# Altium PCB PCB1.PcbDoc
Units mm, origin at the board's own origin, x right, y up, seen from the top; angles counter-clockwise.
Board outline 46.86 x 26.86 mm, 2 copper layers (Top Layer, Bottom Layer), stack 1.57 mm thick; 17 components, 21 nets, 77 pads, 63 vias.
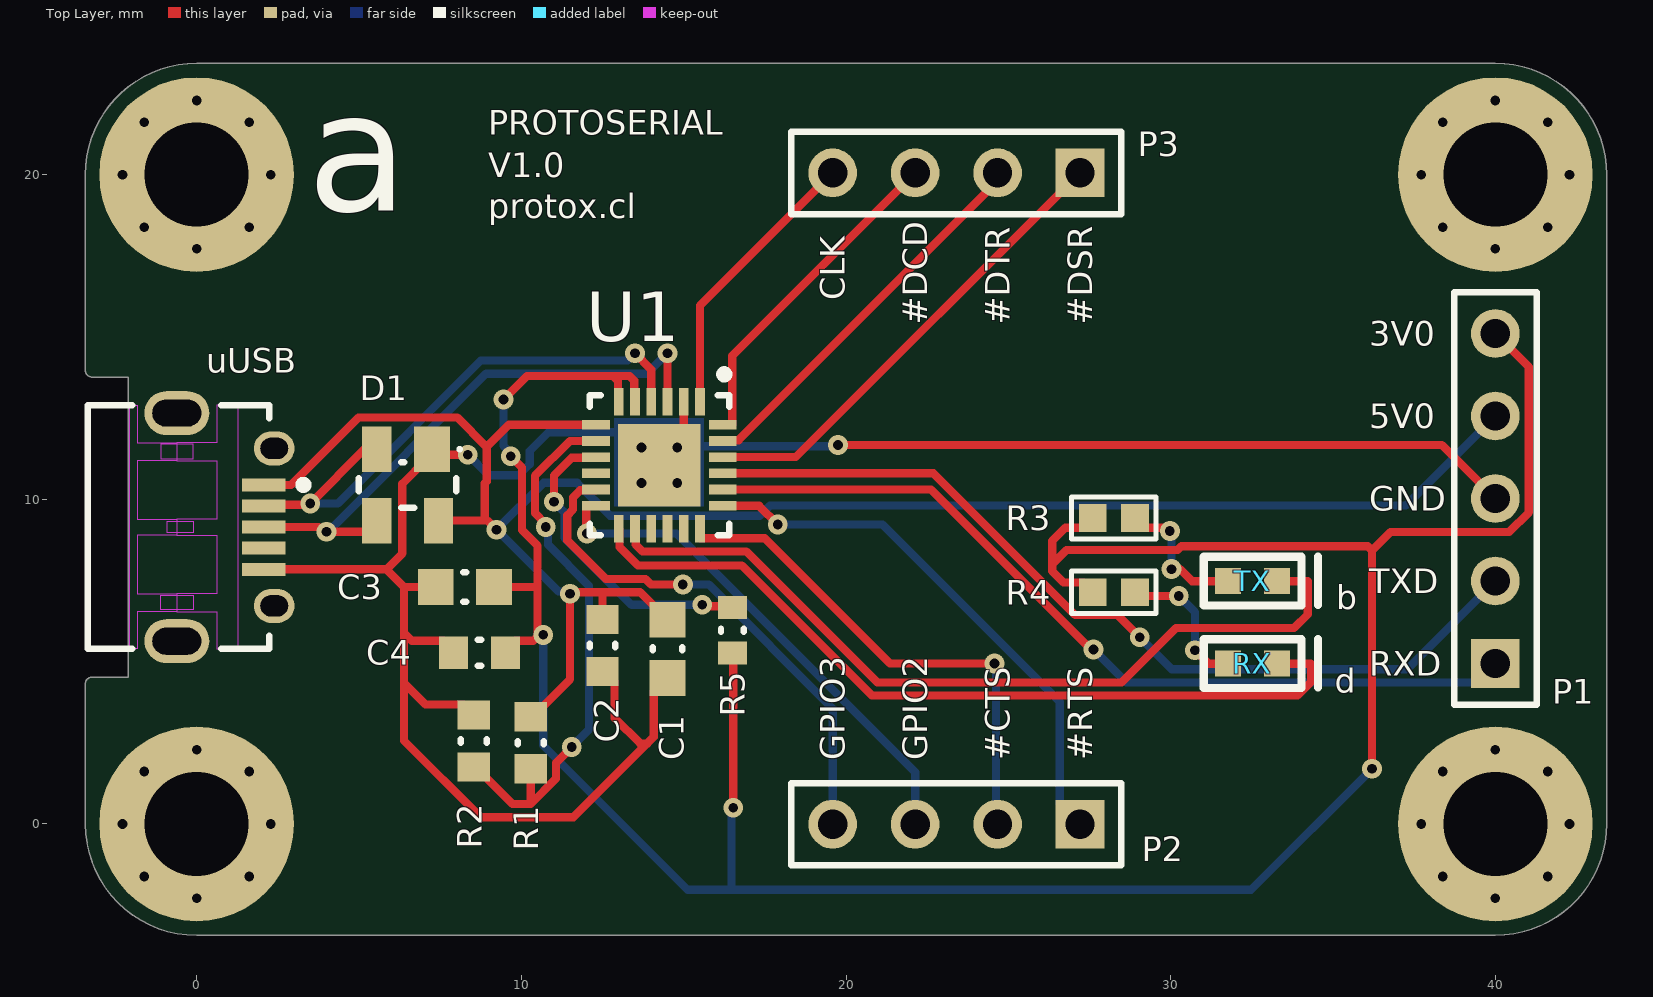
[diagram p0: Top Layer view]
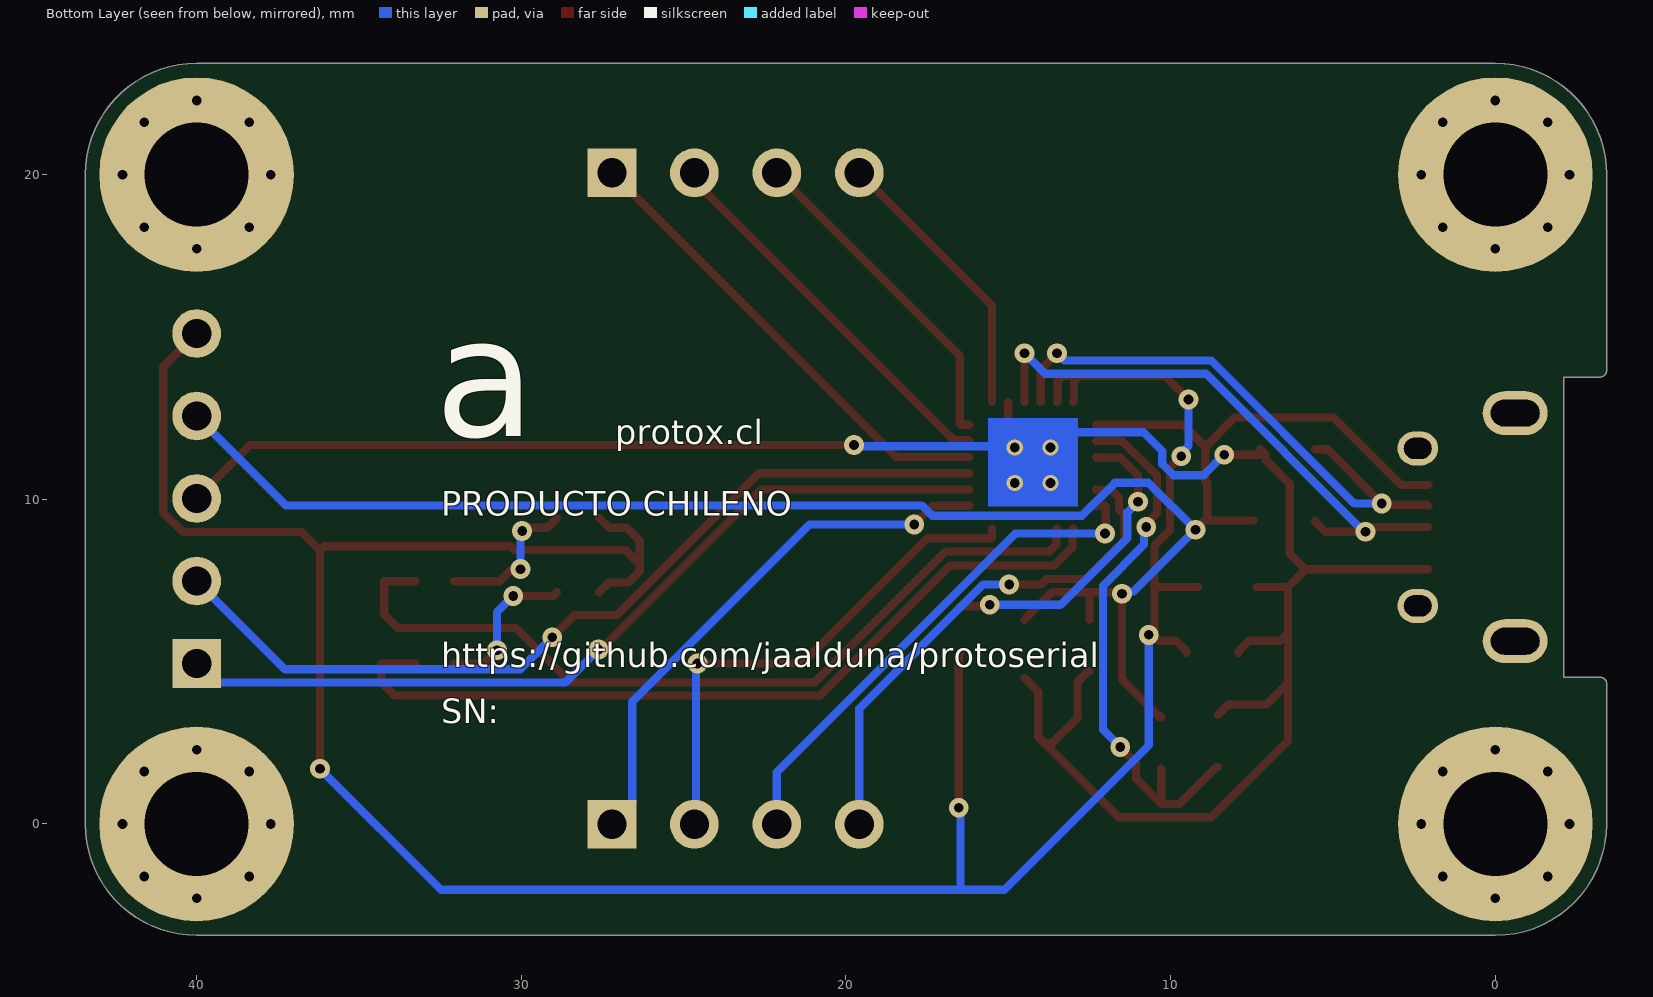
[diagram p1: Bottom Layer view, seen from below]

## Layer stack, top to bottom
Top Solder: solder mask 0.0102, Solder Resist, Dk 3.5
Top Layer: signal copper 0.035
Dielectric 1: dielectric 1.5, FR-4, Dk 4.8
Bottom Layer: signal copper 0.035
Bottom Solder: solder mask 0.0102, Solder Resist, Dk 3.5

## Board outline
-3.429,0 -3.429,4.318 cw(c-3.226,4.318) -3.226,4.521 -2.111,4.521 -2.111,13.767 -3.226,13.767 cw(c-3.226,13.97) -3.429,13.97 -3.429,20 cw(c0,20) 0,23.429 cw(c0,23.302) 0.001,23.429 39.926,23.429 cw(c39.926,23.302) 39.963,23.424 cw(c40,23.302) 40,23.429 cw(c40,20) 43.429,20 43.429,0 cw(c40,0) 40,-3.429 cw(c40,-3.302) 39.963,-3.424 cw(c39.926,-3.302) 39.926,-3.429 0,-3.429 cw(c0,-3.302) -0.001,-3.429 cw(c0,0)

## Design rules (kind name [scope] priority, off if disabled: settings)
Clearance [All] p1: gap=0.152 ignorepadtopadclearanceinfootprint=FALSE
MinimumSolderMaskSliver [All] p1: minsoldermaskwidth=0.152
PolygonConnect [All] p1: connectstyle=Relief reliefconductorwidth=0.254 reliefentries=4 polygonreliefangle="90 Angle" airgapwidth=0.254
RoomDefinition top [InComponentClass('top')] p1: confinementstyle=ConfineIn formatcopy=TRUE lockcomponents=FALSE outline -3.753,-1.656 41.647,-1.656 41.647,21.694 -3.753,21.694
RoutingVias [All] p1: holewidth=0.3 width=0.61 viastyle="Through Hole" minholewidth=0.3 minwidth=0.61 maxholewidth=0.3 maxwidth=0.61
SilkToSolderMaskClearance [IsPad] p1: minsilkscreentomaskgap=0.102 clearancetoexposedcopper=TRUE
SolderMaskExpansion [All] p1: expansion=0.102
Width [All] p1: maxlimit=0.254 minlimit=0.152 preferedwidth=0.254
28 further rules are at their usual default settings.

## Components (designator, comment, footprint, x,y, rotation, side; value= is the part's Value field where it differs from the comment)
C1 "CAP 4.7uF 10V 0603(1608)" CAPC0603(1608)100_M 14.5,5.394 r90 top value=4.7uF
C2 "CAP 100nF 10V 0603(1608)" CAPC0603(1608)100_N 12.5,5.5 r90 top value=100nF
C3 "CAP 4.7uF 10V 0603(1608)" CAPC0603(1608)100_M 8.26,7.301 r0 top value=4.7uF
C4 "CAP 100nF 10V 0603(1608)" CAPC0603(1608)100_N 8.71,5.271 r0 top value=100nF
D1 "SP0503BAHTG" LFUS-SOT143-4_V 6.5,10.444 r270 top
P1 "Header 5" HDR1X5 40,4.945 r90 top
P2 "Header 4" HDR1X4 27.21,-0.008 r180 top
P3 "Header 4" HDR1X4 27.21,20.058 r180 top
R1 "22K1 1% 0603(1608)" RESC0603(1608)_N 10.292,2.5 r90 top value="22100.00 Ohm"
R2 "47K5 1% 0603(1608)" RESC0603(1608)_N 8.54,2.556 r270 top value="47500.00 Ohm"
R3 "270" RES0603 28.25,9.426 r180 top
R4 "270" RES0603 28.25,7.14 r180 top
R5 "1K 5% 0603(1608)" RESC0603(1608)_L 16.5,5.969 r270 top value="1000.00 Ohm"
RX "LED_YELLOW" LED0603 33.268,4.938 r180 top
TX "LED_BLUE" LED0603 33.268,7.478 r180 top
U1 "CP2102N-A01-GQFN24" SLAB-QFN-24-2550x2550TP_A_V 14.25,11.05 r270 top
uUSB "ZX62D-B-5P8" HIRO-ZX62D-B-5P8_V 0.889,9.144 r270 top (schematic designator J1)

## Footprints (in the part's own frame and the unit in brackets; to place one, negate y for a bottom-side part, rotate by r counter-clockwise, add the part's x,y. Pads: shape width x height; smd on the part's side, far side on the other; paste and mask are expansions set on the pad)
CAPC0603(1608)100_M [mm] "Chip Capacitor, Body 1.6x0.8mm, Height 1.0mm, IPC Low Density"
  rect 1.1x1.1 smd: 1(-0.9,0) 2(0.9,0)
  silkscreen extent -0.05,-0.45 0.05,0.45, body extent -0.87,-0.47 0.88,0.48, height 1
CAPC0603(1608)100_N [mm] "Chip Capacitor, Body 1.6x0.8mm, Height 1.0mm, IPC Medium Density"
  rect 0.9x1 smd: 1(-0.8,0) 2(0.8,0)
  silkscreen extent -0.05,-0.4 0.05,0.4, body extent -0.87,-0.48 0.88,0.47, height 1
HDR1X4 [mm] "Connector; Header; 4 Position"
  rect 1.5x1.5 hole 0.9: 1(0,0)
  round 1.5 hole 0.9: 2(2.54,0) 3(5.08,0) 4(7.62,0)
  silkscreen extent -1.27,-1.27 8.89,1.27
HDR1X5 [mm] "Connector; Header; 5 Position"
  rect 1.5x1.5 hole 0.9: 1(0,0)
  round 1.5 hole 0.9: 2(2.54,0) 3(5.08,0) 4(7.62,0) 5(10.16,0)
  silkscreen extent -1.27,-1.27 11.43,1.27
HIRO-ZX62D-B-5P8_V [mm] "Micro-USB Connector, 9-Leads, Body 7.5x5.6mm, Pitch 0.65mm"
  rect 0.4x1.35 smd: 1(-1.3,1.175) 2(-0.65,1.175) 3(0,1.175) 4(0.65,1.175) 5(1.3,1.175)
  oval 1.05x1.25 hole 0.65 slot 0.85 at 90 deg: 6(-2.425,1.5) 7(2.425,1.5)
  oval 1.35x2 hole 0.825 slot 1.5 at 90 deg: 8(-3.513,-1.5) 9(3.513,-1.5)
  Top Layer keep-out region: 2.55,-2 2.1,-2 2.1,-1 2.55,-1
  Top Layer keep-out region: -2.55,-2 -2.1,-2 -2.1,-1 -2.55,-1
  Top Layer keep-out region: -0.18,-1.8 -0.18,-1 0.18,-1 0.18,-1.8
  Top Layer keep-out region: -3.75,-2.725 -2.6,-2.725 -2.6,-1.5 -2.05,-1.5 -2.05,-2.725 -0.25,-2.725 -0.25,-1.5 0.25,-1.5 0.25,-2.725 2.05,-2.725 2.05,-1.5 2.6,-1.5 2.6,-2.725 3.75,-2.725 3.75,-2.95 -3.75,-2.95
  Top Layer keep-out region: -2.6,-1.5 -2.05,-1.5 -2.05,-0.275 -0.25,-0.275 -0.25,-1.5 0.25,-1.5 0.25,-0.275 2.05,-0.275 2.05,-1.5 2.6,-1.5 2.6,-0.275 3.75,-0.275 3.75,0.395 -3.75,0.395 -3.75,-0.275 -2.6,-0.275
  silkscreen extent -3.75,-4.25 3.75,2.52, body extent -4.05,-4.15 4.05,1.65, height 2.75
LED0603 [mm]
  rect 0.8x0.8 smd: A(1.5,0) K(0,0)
  silkscreen extent -1.27,-0.76 2.25,0.75, body extent -0.08,-0.41 1.54,0.39, height 0.6
LFUS-SOT143-4_V [mm] "SOT143, 4-Leads, Body 3.04x1.4mm, Pitch 1.90mm"
  rect 1.4x1.1 smd: 1(-1.1,0.75)
  rect 1.4x0.9 smd: 2(-1.1,-0.95) 3(1.1,-0.95) 4(1.1,0.95)
  silkscreen extent -1.15,-1.5 0.7,1.65, body extent -0.7,-1.52 0.7,1.52, height 1.22
RES0603 [mm] "Chip Resistor, 2-Leads, Body 1.60x0.75mm (0603), IPC Medium Density"
  rect 0.85x0.85 smd: 1(-0.65,0) 2(0.65,0)
  silkscreen extent -1.3,-0.65 1.3,0.65, body extent -0.87,-0.43 0.87,0.43, height 0.35
RESC0603(1608)_L [mm] "Chip Resistor, Body 1.6x0.8mm, IPC High Density"
  rect 0.7x0.9 smd: 1(-0.7,0) 2(0.7,0)
  silkscreen extent -0.05,-0.35 0.05,0.35, body extent -0.85,-0.47 0.85,0.47, height 0.6
RESC0603(1608)_N [mm] "Chip Resistor, Body 1.6x0.8mm, IPC Medium Density"
  rect 0.9x1 smd: 1(-0.8,0) 2(0.8,0)
  silkscreen extent -0.05,-0.4 0.05,0.4, body extent -0.85,-0.47 0.85,0.47, height 0.6
SLAB-QFN-24-2550x2550TP_A_V [mm] "QFN, 6-Leads, Body 4x4mm, Pitch 0.5mm, Thermal Pad 2.55x2.55mm"
  rect 0.85x0.3 smd: 1(-1.95,1.25) 2(-1.95,0.75) 3(-1.95,0.25) 4(-1.95,-0.25) 5(-1.95,-0.75) 6(-1.95,-1.25) 13(1.95,-1.25) 14(1.95,-0.75) 15(1.95,-0.25) 16(1.95,0.25) 17(1.95,0.75) 18(1.95,1.25)
  rect 0.3x0.85 smd: 7(-1.25,-1.95) 8(-0.75,-1.95) 9(-0.25,-1.95) 10(0.25,-1.95) 11(0.75,-1.95) 12(1.25,-1.95) 19(1.25,1.95) 20(0.75,1.95) 21(0.25,1.95) 22(-0.25,1.95) 23(-0.75,1.95) 24(-1.25,1.95)
  rect 2.55x2.55 smd: 25(0,0)
  silkscreen extent -2.92,-2.15 2.15,2.15, body extent -2,-2 2,2, height 0.8

## Part data
C1 C3: library part CMP-1035-02787-1, "CAP 4.7uF 10V ±20% 0603 (1608 Metric) Thickness 1mm SMD", Case-EIA=0603, Case-Metric=1608, Rated Voltage="10 V", Tolerance=±20%, Max Thickness="1 mm", Technology=SMT
C2 C4: library part CMP-1035-02581-1, "CAP 100nF 10V ±20% 0603 (1608 Metric) Thickness 1mm SMD", Case-EIA=0603, Case-Metric=1608, Rated Voltage="10 V", Tolerance=±20%, Max Thickness="1 mm", Technology=SMT
D1: library part CMP-2000-05191-1, "TVS Diode Array, 30 pF, 30 KV, -40 to 85 degC, 4-Pin SOT143, RoHS, Tape and Reel", Capacitance Value=30pF, Clamping Voltage=8V, Leakage Current=0.1uA, Manufacturer=Littelfuse, Operating Temperature Classification=Industrial, Operating Temperature Max Deg. C=85C, Operating Temperature Min Deg. C=-40C, Operating Temp Range=-40Cto85C, Package / Case=SOT-143, Reverse Stand-off Voltage=5.5(Min)V, Working Voltage=5.5V, Working Voltage (Max)=5.5V(Min), Clamping Voltage (Max)=8V, Configuration=Triple, Datasheet URL=https://datasheet.ciiva.com/15143/getdatasheetpartid-116020-15143550.pdf, Datasheet Version=Dec-13, Direction Type=Uni-Directional, Leakage Current (Max)=0.1uA, Manufacturer URL=http://www.littelfuse.com/, Mounting=SurfaceMount, Mounting Style=SurfaceMount, Number of Elements=3, Package Type=SOT-143, Packaging=TapeandReel, Pin Count=3+Tab, Polarity=Uni-Directional, Product Depth (mm)=1.4mm, Product Height (mm)=1.05mm, Product Length (mm)=3.04mm, Rad Hardened=No, Suppressor Type=TVS
P1: "Header, 5-Pin", LatestRevisionDate=17-Jul-2002, LatestRevisionNote="Re-released for DXP Platform.", Publisher="Altium Limited"
P2 P3: "Header, 4-Pin", LatestRevisionDate=17-Jul-2002, LatestRevisionNote="Re-released for DXP Platform.", Publisher="Altium Limited"
R1: library part CMP-1012-00660-1, "22K1 0.1W 1% 0603 (1608 Metric)  SMD", Case-EIA=0603, Case-Metric=1608, Power="0.1 W", Tolerance="1 %", Technology=SMT
R2: library part CMP-1012-00700-1, "47K5 0.1W 1% 0603 (1608 Metric)  SMD", Case-EIA=0603, Case-Metric=1608, Power="0.1 W", Tolerance="1 %", Technology=SMT
R3 R4: library part 21, Package='0603', Tolerance=1%, ID=21, solutionId=87
R5: library part CMP-1012-00074-1, "1K 0.1W 5% 0603 (1608 Metric)  SMD", Case-EIA=0603, Case-Metric=1608, Power="0.1 W", Tolerance="5 %", Technology=SMT
RX: library part 7, "=description", Part Number="LED YELLOW", ID=7, solutionId=35, type=led
TX: library part 6, "=description", Part Number="LED BLUE", ID=6, solutionId=34, type=led
U1: library part CMP-2000-07570-1, "USBXpress(TM) Family, 4 GPIOs, 2.2 to 3.6 V, -40 to 85 degC, 24-Pin QFN, RoHS", Case\/Package=QFN, Manufacturer="Silicon Labs", Max Operating Temperature=85degC, Max Supply Voltage=3.6V, Min Operating Temperature=-40degC, Min Supply Voltage=3V, Package Description="24-Pin Quad Flat No-lead Package, Body 4 x 4 mm, Pitch 0.5 mm", Package Reference=QFN-24-2550x2550TP_A, Datasheet URL=http://www.silabs.com/documents/public/data-sheets/cp2102n-datasheet.pdf, Datasheet Version="Rev. 1.1, 08/2016", Manufacturer URL=http://www.silabs.com/, Mounting Technology=SurfaceMount, Number of Pins=24, REACH SVHC=Unknown, RoHSCompliant=False
uUSB: library part CMP-0029-00002-1, "Right Angle Receptacle Connector, Micro USB, 30 V(AC), -30 to 85 degC, 5-Pin SMD, RoHS, Tape and Reel", Capacitance="1 uF", Case/Package=1206, Case Code (Metric)=3216, Max Operating Temperature=125degC, Min Operating Temperature=-55degC, Package Quantity=2000, Resistance="7.5 Ohm", Tolerance=10%, Voltage Rating="35 V", Case Code (Imperial)=1206, ComponentLink1Description="Manufacturer URL", ComponentLink1URL=https://www.hirose.com, ComponentLink2Description=Datasheet, ComponentLink2URL=https://www.hirose.com/product/en/download_file/key_name/ZX62D-B-5P8/category/Catalog/doc_file_id/31704/?file_category_id=5&item_id=02420034000&is_series=, ComponentLink3Description="Package Specification", ComponentLink3URL=https://www.hirose.com/product/en/download_file/key_name/ZX62D-B-5P8/category/Drawing%20(2D)/doc_file_id/36535/?file_category_id=6&item_id=02420034000&is_series=, DatasheetVersion=Aug-16, ESR="7.5 Ohm", Height="1.8 mm", Length="3.2 mm", Mount="Surface Mount", PackageDescription="USB Connector, 5 Position Surface Mount, Length 8 mm, Height 2.65 mm", PackageReference=ZX62D-B-5P8, Packaging="Tape and Reel", Pins=2, Radiation Hardening=No, REACH SVHC="No SVHC", RoHSCompliant=True, Voltage Rating (DC)="35 V", Weight="0.000571 oz", Width="1.6 mm"

## Free pads (board coordinates)
  round 6 hole 3.2: 4(0,0) 4(0,20) 4(40,0) 4(40,20)

## Via types
v1: diameter 0.61, hole 0.3, Top Layer to Bottom Layer, 32 vias
v2: diameter 0.61, hole 0.3, Top Layer to Bottom Layer, tented both sides, 27 vias
v3: diameter 0.5, hole 0.3, Top Layer to Bottom Layer, 4 vias

## Nets (pads, with @x,y where several pads share a name; then routed paths per layer and width w, separated by ;. In a path a pad name is that pad's centre, name@x,y a point inside that pad or via, vN(x,y) a via of type N, cw(c..) or ccw(c..) an arc to the next point about the centre after c; other vN are vias at no path point)
3V3: C3.2 C4.2 P1.5 R3.2 R4.2 R5.2 U1.5 U1.6 | length 88.1
  Top Layer w0.254: C3.2 10.5,7.301 ; v2(9.45,13.075) 10.175,13.8 12.825,13.8 ; C4.2 9.51,5.321 9.833,5.644 10.369,5.644 10.5,5.775 10.625,5.775 v2(10.675,5.825) ; v2(9.675,11.326) 10.018,10.983 10.018,9.056 10.5,8.574 10.5,7.301 ; v2@10.5,5.825 10.5,7.301 ; U1.6@13,13 12.977,13.023 12.977,13.648 12.825,13.8 ; U1.5 13.477,13.023 13.477,13.659 13.336,13.8 12.825,13.8 ; R5.2 16.525,5.244 v2(16.525,0.5) ; R4.2 27.302,7.438 26.702,7.438 26.35,7.79 26.35,8 ; R3.2 27.302,9.128 26.76,9.128 26.35,8.718 26.35,8 ; v2(36.2,1.7) 36.2,8.425 ; P1.5 41.029,14.076 41.029,9.599 40.426,8.996 36.771,8.996 36.2,8.425 ; 26.35,8 26.791,8.441 30.217,8.441 30.333,8.556 36.069,8.556 36.2,8.425
  Bottom Layer w0.254: v2(9.45,13.075) 9.45,11.647 9.675,11.422 v2(9.675,11.326) ; v2(10.675,5.825) 10.675,2.424 15.124,-2.025 16.475,-2.025 ; v2(16.525,0.5) 16.475,0.45 16.475,-2.025 ; v2(36.2,1.7) 32.475,-2.025 16.475,-2.025
#CTS: P2.2 U1.18 | length 15.9
  Top Layer w0.254: U1.18 15.5,8.825 15.523,8.802 17.497,8.802 21.354,4.945 v2(24.575,4.945)
  Bottom Layer w0.254: v2(24.575,4.945) 24.623,4.898 24.623,0.04 P2.2
#DCD: P3.3 U1.24 | length 10.4
  Top Layer w0.254: U1.24 16.475,12.3 16.498,12.323 16.498,14.426 P3.3
#DSR: P3.1 U1.22 | length 14.6
  Top Layer w0.254: U1.22 18.452,11.3 P3.1
#DTR: P3.2 U1.23 | length 12
  Top Layer w0.254: U1.23 16.223,11.823 16.693,11.823 24.67,19.8 P3.2
#RI/CLK: P3.4 U1.1 | length 8.8
  Top Layer w0.254: U1.1 15.5,15.968 P3.4
#RTS: P2.1 U1.19 | length 16.9
  Top Layer w0.254: U1.19 17.325,9.8 v2(17.9,9.225)
  Bottom Layer w0.254: v2(17.9,9.225) 21.121,9.225 26.587,3.759 26.587,0.615 P2.1
GND: C1.1 C2.1 C3.1 C4.1 D1.1 P1.3 R2.1 U1.2 U1.25 uUSB.5 | length 69.6
  Top Layer w0.254: uUSB.5 5.844,7.844 ; D1.1 D1.1@7.082,11.376 ; C3.1 6.387,7.301 ; C4.1 7.91,5.321 7.587,5.644 6.627,5.644 6.387,5.885 ; v2(8.35,11.376) D1.1@7.082,11.376 ; R2.1 8.217,3.679 7.046,3.679 6.387,4.338 ; C2.1 12.55,4.7 12.873,4.377 12.873,3.267 13.665,2.475 13.875,2.475 ; U1.25 v3(14.8,11.6) 15,11.8 U1.2 ; C1.1 14.077,4.071 14.077,2.677 13.875,2.475 ; v2(19.75,11.675) 38.35,11.675 P1.3 ; 5.844,7.844 6.335,8.335 6.335,10.48 7.082,11.226 D1.1@7.082,11.376 ; 5.844,7.844 6.387,7.301 ; 6.387,4.338 6.387,2.564 8.742,0.209 11.609,0.209 13.875,2.475 ; 6.387,4.338 6.387,5.885 ; 6.387,5.885 6.387,7.301
  Bottom Layer w0.254: v2(8.35,11.376) 8.985,10.741 9.917,10.741 10.26,11.084 10.26,11.486 10.84,12.066 13.234,12.066 v3(13.7,11.6) ; v3(14.8,11.6) 14.837,11.638 19.713,11.638 v2(19.75,11.675)
  other v3: 13.7,10.5 14.8,10.5
GPIO.2/RS485: P2.3 U1.12 | length 15.9
  Top Layer w0.254: v2(12.026,8.95) 12.002,8.974 12.002,9.777 12.025,9.8 U1.12
  Bottom Layer w0.254: v2(12.026,8.95) 14.775,8.95 22.13,1.596 P2.3
GPIO.3/WAKEUP: P2.4 U1.11 | length 16.1
  Top Layer w0.254: U1.11 12.277,10.277 11.807,10.277 11.593,10.063 11.593,9.683 11.416,9.506 11.416,8.733 12.602,7.546 13.822,7.546 13.993,7.375 v2(14.976,7.375)
  Bottom Layer w0.254: v2(14.976,7.375) 15.776,7.375 19.59,3.561 P2.4
NetD1_2: D1.2 U1.4 uUSB.2 | length 17.8
  Top Layer w0.254: uUSB.2 2.104,9.833 3.46,9.833 v2(3.5,9.873) 5.171,11.544 D1.2 ; v2(13.5,14.5) 14,14 U1.4
  Bottom Layer w0.254: v2(3.5,9.873) 4.348,9.873 8.75,14.275 13.275,14.275 v2(13.5,14.5)
NetD1_3: D1.3 U1.3 uUSB.3 | length 18
  Top Layer w0.254: uUSB.3 3.76,9.144 3.904,9 v2(4,9) 5.227,9 5.55,9.323 D1.3 ; U1.3 v2(14.5,14.5)
  Bottom Layer w0.254: v2(4,9) 4.05,9 8.918,13.869 13.869,13.869 v2(14.5,14.5)
NetR3_1: R3.1 TX.A | length 4.6
  Top Layer w0.254: R3.1 29.198,9.128 29.776,9.128 29.879,9.025 v2(29.975,9.025) ; v2(30.026,7.85) 30.285,7.85 30.657,7.478 TX.A TX.A@32.068,7.478
  Bottom Layer w0.254: v2(29.975,9.025) 30.026,8.974 v2(30.026,7.85)
NetR4_1: R4.1 RX.A | length 4.8
  Top Layer w0.254: R4.1 29.015,7.025 v2(30.25,7.025) ; v2(30.75,5.35) 31.162,4.938 RX.A@32.068,4.938
  Bottom Layer w0.254: v2(30.25,7.025) 30.75,6.525 v2(30.75,5.35)
NetR5_1: R5.1 U1.9 | length 9.6
  Top Layer w0.254: v2(11.009,9.925) 11.009,10.737 11.548,11.277 12.277,11.277 U1.9 ; v2(15.575,6.75) 15.615,6.71 16.46,6.71 R5.1
  Bottom Layer w0.254: v2(11.009,9.925) 11.334,9.599 11.334,8.815 13.399,6.75 v2(15.575,6.75)
NetRX_K: RX.K U1.13 | length 25.6
  Top Layer w0.254: U1.13@13,9.1 13.023,9.077 13.023,8.532 13.596,7.96 16.791,7.96 20.796,3.954 33.904,3.954 34.325,4.375 34.325,4.925 34.312,4.938 RX.K
NetTX_K: TX.K U1.14 | length 25.8
  Top Layer w0.254: U1.14 13.523,9.077 13.523,8.607 13.736,8.394 16.931,8.394 20.964,4.361 28.487,4.361 30.16,6.034 33.799,6.034 34.222,6.458 34.222,7.478 TX.K
RXD: P1.1 U1.20 | length 26.5
  Top Layer w0.254: U1.20 22.62,10.3 27.545,5.375 v2(27.625,5.375)
  Bottom Layer w0.254: v2(27.625,5.375) 28.641,4.359 39.414,4.359 P1.1
TXD: P1.2 U1.21 | length 27.4
  Top Layer w0.254: U1.21 22.695,10.8 27.059,6.436 28.364,6.436 v2(29.05,5.75)
  Bottom Layer w0.254: v2(29.05,5.75) 30.034,4.766 37.281,4.766 P1.2
VBUS: C1.2 C2.2 D1.4 P1.4 R1.2 U1.7 uUSB.1 | length 60.5
  Top Layer w0.254: uUSB.1 2.905,10.444 4.984,12.523 8.029,12.523 8.935,11.618 ; D1.4 8.96,9.344 v2(9.239,9.065) ; 8.876,9.428 8.876,10.493 8.935,10.552 8.935,11.618 ; R1.2 10.342,3.3 11.5,4.458 v2(11.5,7.094) 11.546,7.14 12.5,7.14 ; U1.7 9.617,12.3 8.935,11.618 ; C2.2 12.5,7.14 ; C1.2 13.654,7.14 12.5,7.14
  Bottom Layer w0.254: v2(11.5,7.094) 11.432,7.162 11.142,7.162 v2(9.239,9.065) 10.683,10.509 11.721,10.509 12.734,9.496 17.344,9.496 17.658,9.809 37.244,9.809 P1.4
"VBUS NORMALIZED": R1.1 R2.2 U1.8 | length 17.2
  Top Layer w0.254: R2.2 8.59,1.756 9.731,0.615 10.29,0.615 ; R1.1 R1.1 10.29,0.615 ; v2(10.75,9.15) 10.75,9.246 10.424,9.572 10.424,10.728 11.496,11.8 U1.8 ; v2(11.551,2.375) 11.551,2.363 11.071,1.884 11.071,1.396 10.29,0.615
  Bottom Layer w0.254: v2(10.75,9.15) 10.818,9.082 10.818,8.602 12.084,7.336 12.084,2.909 v2(11.551,2.375)
pads on no net: U1.10 U1.15 U1.16 U1.17 uUSB.4 uUSB.6 uUSB.7 uUSB.8 uUSB.9
copper on no net:
  other v1: 0,-2.286 40,-2.286 -1.616,-1.616 1.616,-1.616 38.384,-1.616 41.616,-1.616 -2.286,0 2.286,0 37.714,0 42.286,0 -1.616,1.616 1.616,1.616 38.384,1.616 41.616,1.616 0,2.286 40,2.286 0,17.714 40,17.714 -1.616,18.384 1.616,18.384 38.384,18.384 41.616,18.384 -2.286,20 2.286,20 37.714,20 42.286,20 -1.616,21.616 1.616,21.616 38.384,21.616 41.616,21.616 0,22.286 40,22.286

## Other copper
Bottom Layer:
  rectangle net GND: 12.85,9.775 15.625,12.5

## Silkscreen, mask and mechanical layers (free items; w line width, h text height)
Top Overlay:
  text "PROTOSERIAL" at 8.975,21.225 h0.75
  text "V1.0" at 8.975,19.925 h0.75
  text "protox.cl" at 8.975,18.65 h0.75
  text "a" at 3.406,17.674 h6.35
  text "CLK" at 19.965,16.125 h0.75 r90
  text "#DCD" at 22.505,15.375 h0.75 r90
  text "#DTR" at 25.045,15.375 h0.75 r90
  text "#DSR" at 27.585,15.375 h0.75 r90
  text "3V0" at 36.116,14.73 h0.75
  text "5V0" at 36.116,12.19 h0.75
  text "GND" at 36.116,9.65 h0.75
  text "TXD" at 36.116,7.11 h0.75
  text "b" at 35.1,6.375 h1.27
  text "RXD" at 36.116,4.57 h0.75
  text "b" at 35.7,3.8 h1.27
  text "GPIO3" at 19.965,1.96 h0.75 r90
  text "GPIO2" at 22.505,1.96 h0.75 r90
  text "#CTS" at 25.045,1.96 h0.75 r90
  text "#RTS" at 27.585,1.968 h0.75 r90
Bottom Overlay:
  text "protox.cl" at 27.1,11.7 h0.75
  text "a" at 32.669,10.724 h6.35
  text "PRODUCTO CHILENO" at 32.465,9.5 h0.75
  text "https://github.com/jaalduna/protoserial" at 32.465,4.825 h0.75
  text "SN:" at 32.465,3.1 h0.75
Mechanical 1:
  rectangle: 14.875,2.325 29.525,4.25
  lines w0.254: -2.061,4.394 -3.226,4.394 ccw(c-3.226,4.318) -3.302,4.318 -3.302,0 ccw(c0,0) 0,-3.302 39.926,-3.302 ; -2.061,13.894 -3.226,13.894 cw(c-3.226,13.97) -3.302,13.97 -3.302,20 cw(c0,20) 0,23.302 39.926,23.302 ; 40,-3.302 ccw(c40,0) 43.302,0 43.302,20 ccw(c40,20) 40,23.302